# EAGLE board charlieland0 (EAGLE 6.2)
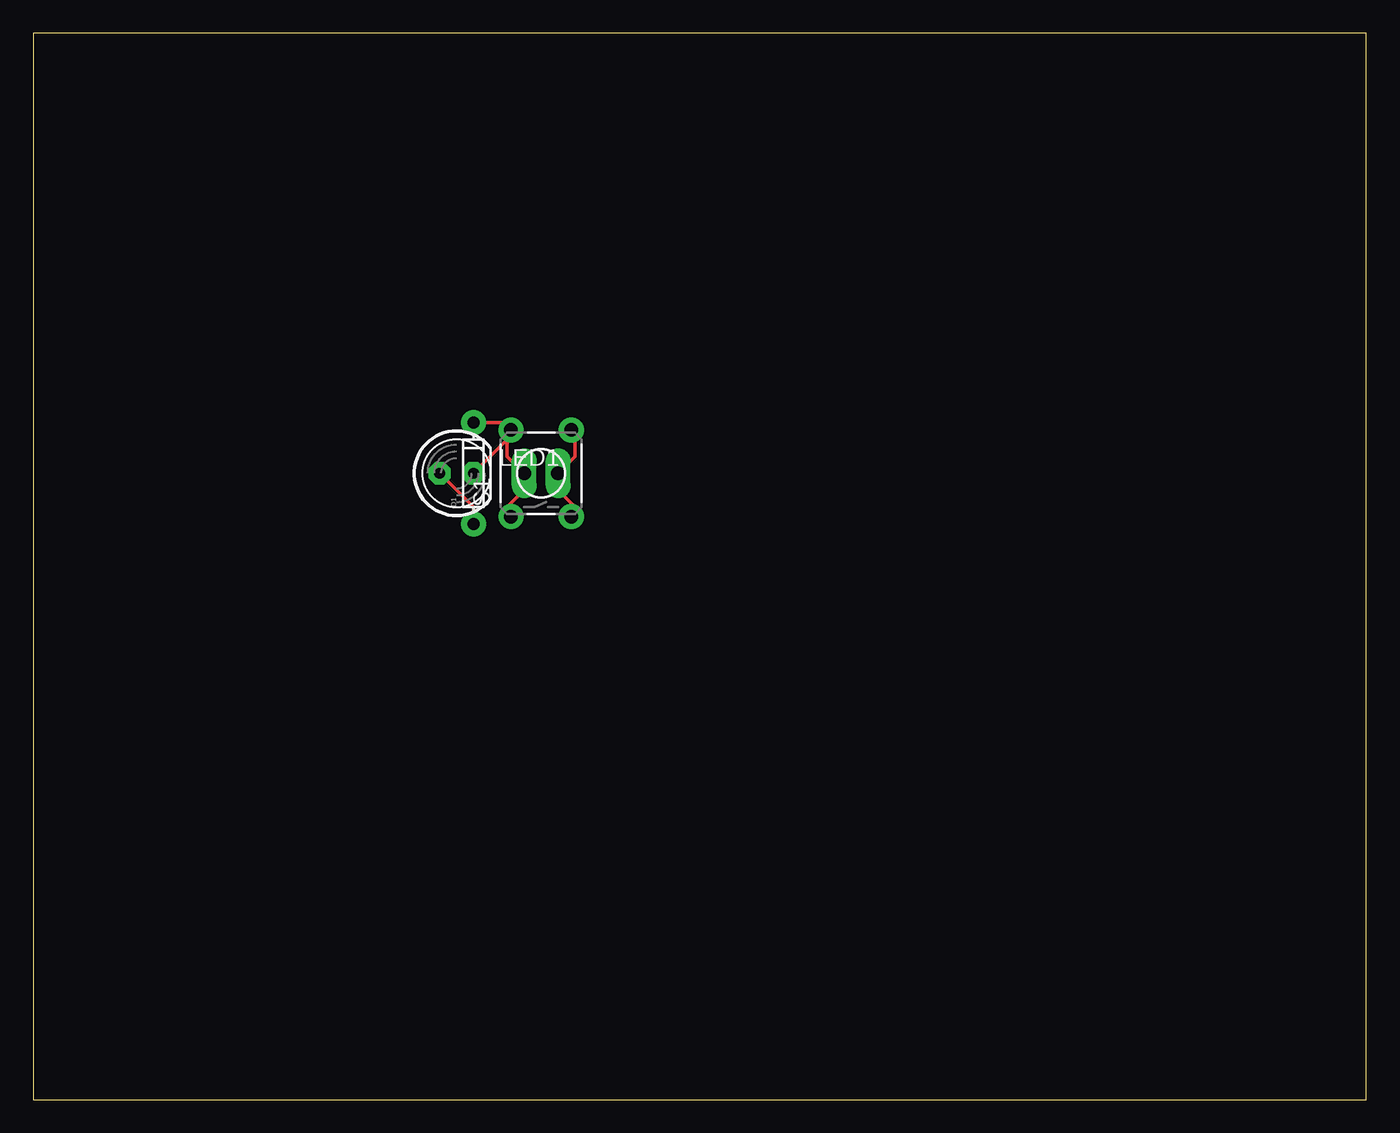
[diagram p0: board, top side]

Size 100 x 80 mm. Coordinates in mm from the lower left corner, seen from the top.
Outline: 0,0 100,0 100,80 0,80 0,0
Copper layers (1*16): Top 0.035mm / dielectric 1.5mm / Bottom 0.035mm
Design rules: minimum track width 10mil, minimum drill 24mil, track to track 8mil, track to pad 8mil, pad to pad 8mil, via to via 8mil, smd to smd 8mil, copper to edge 40mil, drill to drill 8mil, minimum pad ring 10mil, minimum via ring 8mil, stop-mask expansion 4mil, vias tented up to drill 0mil, thermal gap 10mil

## Footprints (pad centres in the part's own frame; a part is rotated, then mirrored left to right if it is on the bottom)
DIODE-1N4148 = drill 0.9 pad 1.88: A -3.81,0; C 3.81,0
1X02_LONGPADS = drill 1.016 pad 1.88 long: 1 0,0; 2 2.54,0
LED5MM = drill 0.813 pad 1.676 octagon: A -1.27,0; K 1.27,0
TACTILE-PTH = drill 1.016 pad 1.88: 1 -3.251,2.261; 2 3.251,2.261; 3 -3.251,-2.261; 4 3.251,-2.261

## Placement (x,y rotation side)
D1  [DIODE-1N4148]  33.02,46.99 90 top
JP2  [1X02_LONGPADS]  39.37,46.99 0 bottom
LED1  [LED5MM]  31.75,46.99 0 top
S1  [TACTILE-PTH]  38.1,46.99 90 top

## Library data of the parts
D1 JP2 S1 = SparkFun
LED1 = adafruit

## Nets
N$1: D1.C JP2.2 LED1.K S1.1 S1.2
N$2: JP2.1 S1.3 S1.4
N$3: D1.A LED1.A

## Tracks (layer width: path | path; a pad name or v marks a point on that pad's centre or on a via)
N$1
  Top 0.254: S1.1 35.56,44.45 36.83,45.72 JP2.2 35.56,48.26 35.56,49.53 | 35.56,49.53 LED1.K | D1.C 35.56,50.8 S1.2 35.56,49.53
N$2
  Top 0.254: S1.4 40.64,49.53 40.64,48.26 JP2.1 39.37,45.72 40.64,44.45 S1.3
N$3
  Top 0.254: LED1.A 33.02,44.45 D1.A